# EAGLE board untitled (EAGLE 9.6.2)
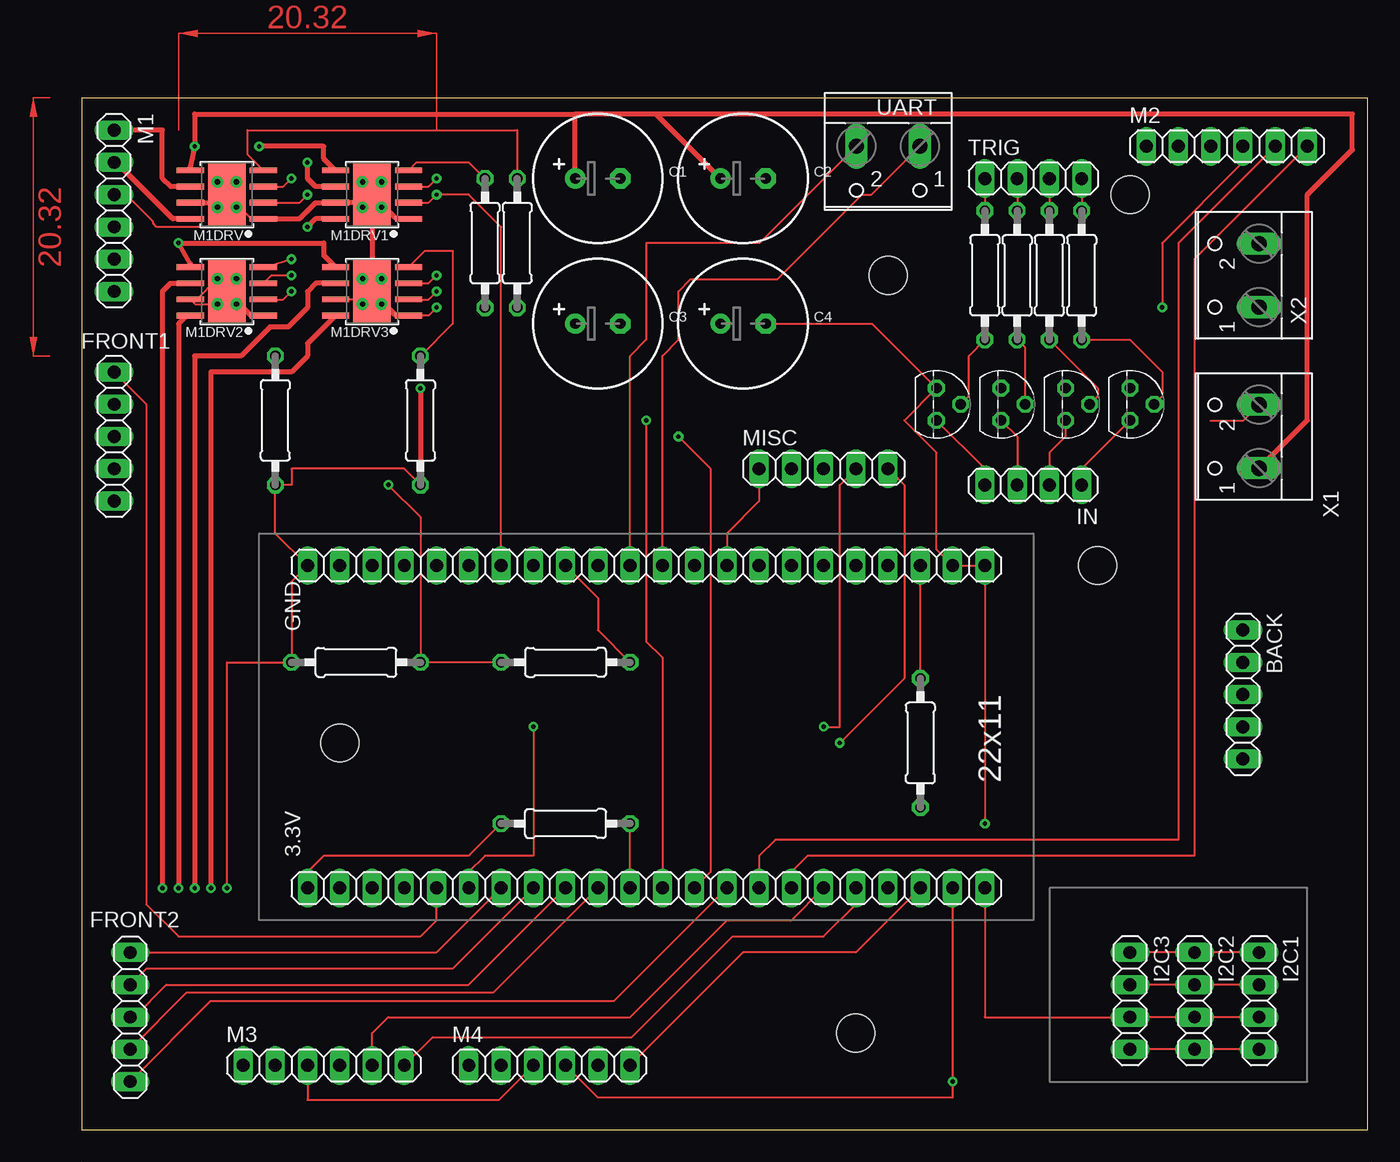
[diagram p0: board, top side]
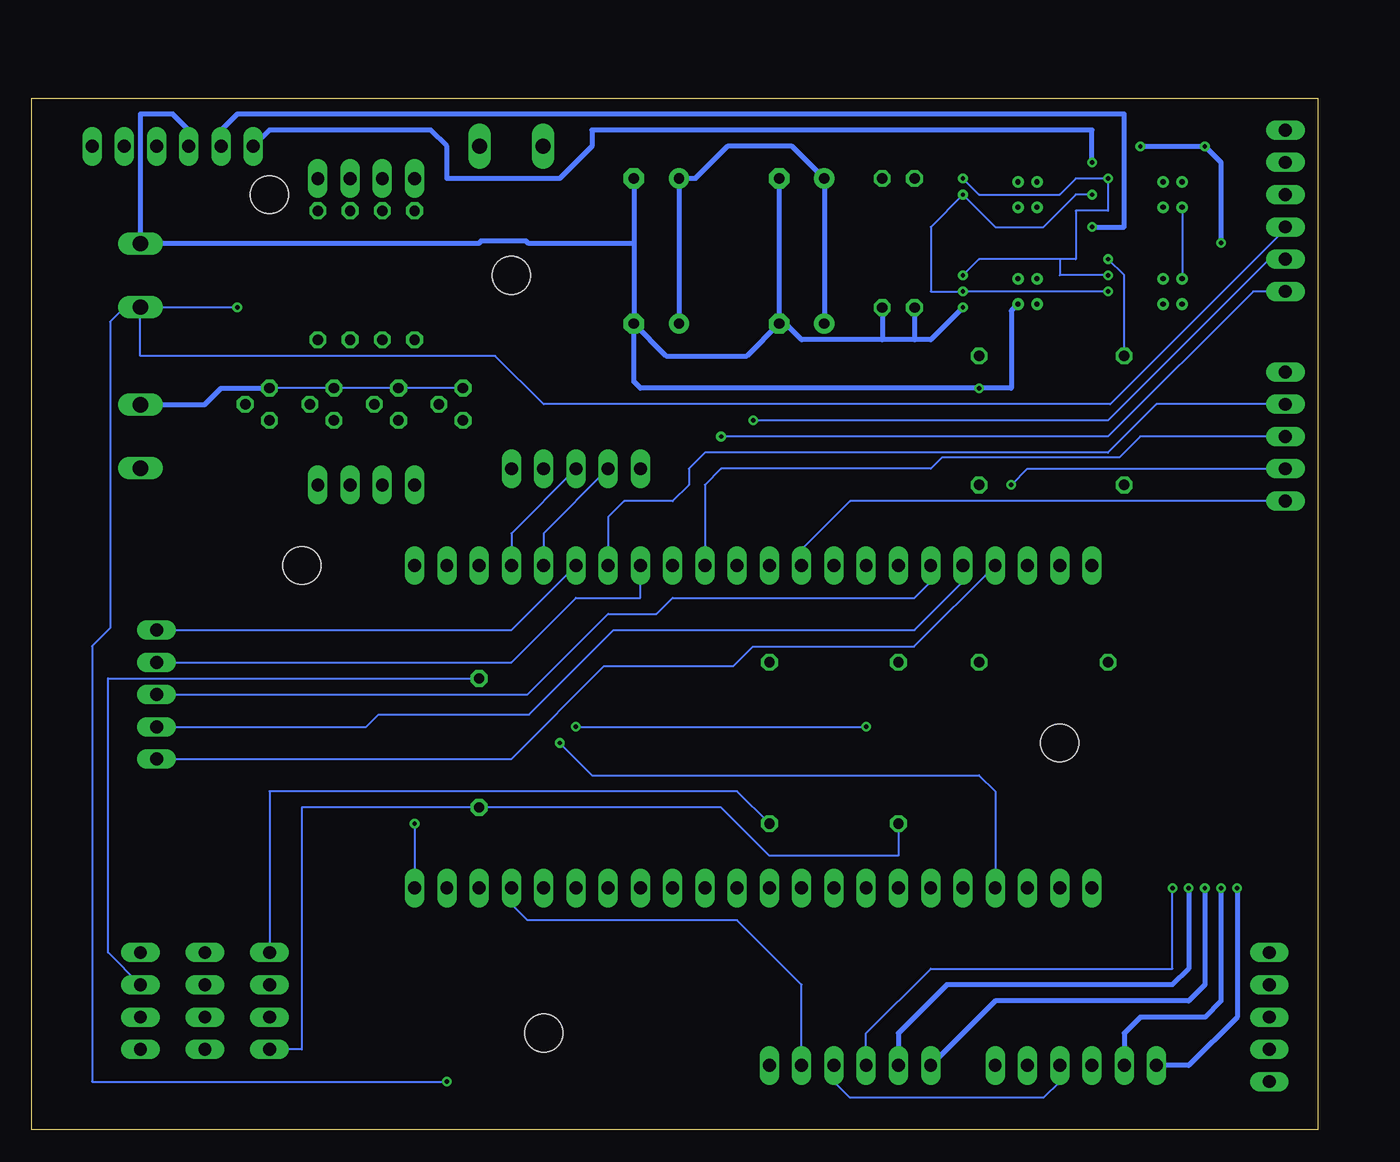
[diagram p1: board, bottom side, seen from below]

Size 101.27 x 81.27 mm. Coordinates in mm from the lower left corner, seen from the top.
Outline: 0,0 101.27,0 101.27,81.27 0,81.27 0,0
Copper layers (1*16): Top 0.035mm / dielectric 1.5mm / Bottom 0.035mm
Design rules "default": minimum track width 6mil, minimum drill 0.35mm, track to track 6mil, track to pad 6mil, pad to pad 6mil, via to via 6mil, smd to smd 6mil, copper to edge 40mil, drill to drill 6mil, minimum pad ring 10mil, minimum via ring 8mil, stop-mask expansion 4mil, vias tented up to drill 0mil, thermal gap 10mil
Net classes: 0 default: clearance 0.205 mm
Holes 3 mm at 82.55,73.66 60.96,7.62 80.01,44.45 20.32,30.48 63.5,67.31

## Footprints (pad centres in the part's own frame; a part is rotated, then mirrored left to right if it is on the bottom)
0207/10 = drill 0.813 octagon: 1 -5.08,0; 2 5.08,0
1X22 = drill 1.016 long: 1 -26.67,0; 2 -24.13,0; 3 -21.59,0; 4 -19.05,0; 5 -16.51,0; 6 -13.97,0; 7 -11.43,0; 8 -8.89,0; 9 -6.35,0; 10 -3.81,0; 11 -1.27,0; 12 1.27,0; 13 3.81,0; 14 6.35,0; 15 8.89,0; 16 11.43,0; 17 13.97,0; 18 16.51,0; 19 19.05,0; 20 21.59,0; 21 24.13,0; 22 26.67,0
1X05 = drill 1.016 long: 1 -5.08,0; 2 -2.54,0; 3 0,0; 4 2.54,0; 5 5.08,0
MICROBUILDER_CELEC_3.5MM_10MM = drill 0.813 pad 1.6: + -1.778,0 | drill 0.813 pad 1.6 octagon: - 1.778,0
1X04 = drill 1.016 long: 1 -3.81,0; 2 -1.27,0; 3 1.27,0; 4 3.81,0
1X06 = drill 1.016 long: 1 -6.35,0; 2 -3.81,0; 3 -1.27,0; 4 1.27,0; 5 3.81,0; 6 6.35,0
MICROBUILDER_HSOP8 = smd 0.45 x 2.15: 1 -1.905,-2.875; 2 -0.635,-2.875; 3 0.635,-2.875; 4 1.905,-2.875; 5 1.905,2.875; 6 0.635,2.875; 7 -0.635,2.875; 8 -1.905,2.875 | smd 4.9 x 2.95: GND 0,0 | drill 0.4: P$1 -1,0.75; P$2 -1,-0.75; P$3 1,-0.75; P$4 1,0.75
TO92 = drill 0.813 octagon: 1 1.27,0; 2 0,1.905; 3 -1.27,0
W237-102 = drill 1.194 long: 1 -2.5,-1.27; 2 2.5,-1.27

## Placement (x,y rotation side)
1K  1k  [0207/10]  38.1,24.13 0 top
1K1  1k  [0207/10]  38.1,36.83 180 top
1K2  1.8k  [0207/10]  21.59,36.83 0 top
1K3  1k  [0207/10]  76.2,67.31 90 top
1K4  1k  [0207/10]  73.66,67.31 90 top
1K5  1k  [0207/10]  71.12,67.31 90 top
1K6  1k  [0207/10]  78.74,67.31 90 top
3.3V  [1X22]  44.45,19.05 0 top
BACK  [1X05]  91.44,34.29 270 top
C1  [MICROBUILDER_CELEC_3.5MM_10MM]  40.64,74.93 0 top
C2  [MICROBUILDER_CELEC_3.5MM_10MM]  52.07,74.93 0 top
C3  [MICROBUILDER_CELEC_3.5MM_10MM]  40.64,63.5 0 top
C4  [MICROBUILDER_CELEC_3.5MM_10MM]  52.07,63.5 0 top
FRONT1  [1X05]  2.54,54.61 270 top
FRONT2  [1X05]  3.81,8.89 90 top
GND  [1X22]  44.45,44.45 0 top
I2C1  [1X04]  92.71,10.16 270 top
I2C2  [1X04]  87.63,10.16 270 top
I2C3  [1X04]  82.55,10.16 270 top
IN  [1X04]  74.93,50.8 180 top
M1  [1X06]  2.54,72.39 270 top
M1DRV  [MICROBUILDER_HSOP8]  11.43,73.66 90 top
M1DRV1  [MICROBUILDER_HSOP8]  22.86,73.66 90 top
M1DRV2  [MICROBUILDER_HSOP8]  11.43,66.04 90 top
M1DRV3  [MICROBUILDER_HSOP8]  22.86,66.04 90 top
M2  [1X06]  90.17,77.47 0 top
M3  [1X06]  19.05,5.08 0 top
M4  [1X06]  36.83,5.08 0 top
MISC  [1X05]  58.42,52.07 0 top
R1  30k  [0207/10]  31.75,69.85 270 top
R2  30k  [0207/10]  34.29,69.85 270 top
R3  1k  [0207/10]  66.04,30.48 90 top
R4  30k  [0207/10]  15.24,55.88 270 top
R5  30k  [0207/10]  26.67,55.88 270 top
T1  2N3904  [TO92]  77.47,57.15 270 top
T2  2N3904  [TO92]  72.39,57.15 270 top
T3  2N3904  [TO92]  67.31,57.15 270 top
T4  2N3904  [TO92]  82.55,57.15 270 top
TRIG  [1X04]  74.93,74.93 0 top
UART  [W237-102]  63.5,76.2 180 top
X1  [W237-102]  91.44,54.61 90 top
X2  [W237-102]  91.44,67.31 90 top

## Library data of the parts
1K 1K1-1K6 R1-R5 = rcl; SPICEPREFIX: R
3.3V BACK FRONT1 FRONT2 GND I2C1-I2C3 IN M1-M4 MISC TRIG = pinhead
C1-C4 M1DRV M1DRV1-M1DRV3 = Adafruit DRV8871
T1-T4 = transistor
UART X1 X2 = con-wago-500; MPN: 237-102; OC_FARNELL: unknown; OC_NEWARK: 70K9898

## Nets
+3V3: 1K.1 3.3V.1 I2C1.4 I2C2.4 I2C3.4 R3.1
+5V: 3.3V.21 M1.4 M2.4 M3.4 M4.4 X2.1
+12V: C1.+ C2.+ C3.+ C4.+ M1DRV1.5 M1DRV2.5 M1DRV3.5 M1DRV.5 X1.1
ARM2: BACK.1 GND.17
GND: 1K2.1 3.3V.22 C1.- C2.- C3.- C4.- GND.1 GND.21 GND.22 I2C1.3 I2C2.3 I2C3.3 M1.3 M1DRV1.1 M1DRV1.7 M1DRV1.GND M1DRV1.P$1 M1DRV1.P$2 M1DRV1.P$3 M1DRV1.P$4 M1DRV2.1 M1DRV2.7 M1DRV2.GND M1DRV2.P$1 M1DRV2.P$2 M1DRV2.P$3 M1DRV2.P$4 M1DRV3.1 M1DRV3.7 M1DRV3.GND M1DRV3.P$1 M1DRV3.P$2 M1DRV3.P$3 M1DRV3.P$4 M1DRV.1 M1DRV.7 M1DRV.GND M1DRV.P$1 M1DRV.P$2 M1DRV.P$3 M1DRV.P$4 M2.3 M3.3 M4.3 R1.2 R2.2 R4.2 R5.2 T1.3 T2.3 T3.3 T4.3 X1.2 X2.2
IN: IN.1 T4.1
M1+: M1.1 M1DRV.6
M1-: M1.2 M1DRV.8
M2+: M1DRV1.6 M2.1
M2-: M1DRV1.8 M2.2
M3+: M1DRV2.6 M3.1
M3-: M1DRV2.8 M3.2
M4+: M1DRV3.6 M4.1
M4-: M1DRV3.8 M4.2
N$1: M1DRV1.4 R1.1
N$2: M1DRV2.4 R4.1
N$3: 1K1.1 GND.9
N$4: M1DRV3.4 R5.1
N$5: GND.11 UART.2
N$6: GND.12 UART.1
N$7: IN.2 T1.1
N$8: 1K3.1 T1.2
N$9: M1DRV.4 R2.1
N$10: 1K3.2 TRIG.3
N$11: IN.3 T2.1
N$12: 1K4.1 T2.2
N$13: 1K4.2 TRIG.2
N$14: IN.4 T3.1
N$15: 1K5.1 T3.2
N$16: 1K5.2 TRIG.1
N$18: 1K6.1 T4.2
N$19: 1K6.2 TRIG.4
P0: GND.14 MISC.1
P1ARM3: BACK.5 GND.4
P2ARM4: BACK.4 GND.5
P3: 3.3V.13 M1.6
P4: 3.3V.4 MISC.5
P5BUZZER: 3.3V.5 FRONT1.1
P6: 3.3V.6 MISC.4
P7STEER: 3.3V.7 FRONT2.5
P8: 3.3V.12 M1.5
P9: 3.3V.15 M2.5
P10: 3.3V.16 M2.6
P11: 3.3V.17 M3.5
P12: 3.3V.18 M3.6
P13: 3.3V.19 M4.5
P14: 3.3V.20 M4.6
P15LASERX: 3.3V.8 FRONT2.4
P16LASERY: 3.3V.9 FRONT2.3
P17LASERTRIG: 3.3V.10 FRONT2.2
P18SDA: 1K.2 3.3V.11 I2C1.1 I2C2.1 I2C3.1
P19SCL: GND.20 I2C1.2 I2C2.2 I2C3.2 R3.2
P20: GND.19 MISC.3
P21: GND.18 MISC.2
P35SONAR: FRONT1.3 GND.13
P38SONARTRIG: FRONT1.5 GND.10
P39SONARECHO: 1K1.2 1K2.2 FRONT1.4
P40: M1DRV1.3 M1DRV2.3 M1DRV3.3 M1DRV.3
P40PWM2: GND.8
P41PWM1: GND.7 M1DRV1.2 M1DRV2.2 M1DRV3.2 M1DRV.2
P42ARM1: BACK.3 GND.6
P43: GND.2
P44: GND.3
P45REARBUMP: BACK.2 GND.15
P46FRONTBUMP: 3.3V.14 FRONT2.1
P48LED: FRONT1.2 GND.16

## Tracks (layer width: path | path; a pad name or v marks a point on that pad's centre or on a via)
+3V3
  Top 0.152: I2C1.4 I2C2.4 I2C3.4 | 1K.1 30.48,21.59 19.05,21.59 17.78,20.32 3.3V.1
  Bottom 0.152: 1K.1 33.02,21.59 43.18,21.59 46.99,25.4 R3.1 80.01,25.4 80.01,6.35 I2C3.4
+5V  (via drill 0.35)
  Top 0.152: 3.3V.21 v68.58,3.81 68.58,2.54 40.64,2.54 M4.4 | M2.4 91.44,76.2 85.09,69.85 v85.09,64.77
  Bottom 0.152: M3.4 20.32,3.81 21.59,2.54 36.83,2.54 38.1,3.81 M4.4 | M1.4 2.54,70.94 16.34,57.15 60.96,57.15 64.77,60.96 92.71,60.96 X2.1 85.13,64.81 v85.09,64.77 93.98,64.77 95.1,63.65 95.1,39.52 96.52,38.1 96.52,3.81 v68.58,3.81
+12V  (via drill 0.35)
  Top 0.406: C1.+ 38.86,80.01 | C2.+ 45.21,80.01 | 45.21,80.01 38.86,80.01 | 45.21,80.01 100.05,80.01 100.05,77.19 96.52,73.66 96.52,55.88 96.48,55.88 X1.1 | M1DRV.5 8.55,75.86 v8.89,77.47 8.89,80.01 38.86,80.01 | M1DRV2.5 8.55,68.24 v7.62,69.85 19.05,69.85 19.05,68.88 M1DRV3.5 | M1DRV1.5 19.05,76.5 19.05,77.47 v13.97,77.47
  Bottom 0.406: v7.62,69.85 7.62,76.2 v8.89,77.47 v13.97,77.47 | C4.+ C2.+ 49.02,74.93 46.48,77.47 41.4,77.47 C1.+ C3.+
ARM2
  Bottom 0.152: BACK.1 63.5,39.37 GND.17
GND  (via drill 0.35)
  Top 0.152: I2C1.3 I2C2.3 I2C3.3 71.12,8.89 3.3V.22 | M3.3 17.78,2.36 32.84,2.36 M4.3 | 10.43,65.04 8.92,65.04 M1DRV2.7 9.04,65.41 M1DRV2.P$4 11.43,66.29 | 10.43,65.04 M1DRV2.P$1 11.43,65.79 M1DRV2.GND | M1DRV.1 13.33,71.75 M1DRV.GND | M1DRV3.P$2 24.52,64.14 M1DRV3.1 27.3,64.14 v27.94,64.77 | 22.86,66.29 M1DRV3.P$4 | M1DRV3.GND 22.22,65.41 M1DRV3.7 | R5.2 25.4,52.07 16.51,52.07 16.51,50.8 R4.2 15.24,46.99 GND.1 16.51,43.18 1K2.1 11.43,36.83 v11.43,19.05 | X1.2 91.44,55.84 88.9,55.84 | C4.- 62.23,63.5 T3.3 64.77,55.88 67.31,53.34 67.31,45.72 GND.21 GND.22 v71.12,24.13 | 11.43,73.91 M1DRV.P$3 | M1DRV.GND 12.18,72.91 M1DRV.P$2 | M1DRV.GND 11.43,73.41 M1DRV.P$1 10.68,71.12 5.92,71.12 5.62,71.42 5.62,71.55 3.51,73.66 M1.3 | M1DRV1.GND 23.61,72.91 M1DRV1.P$2 | M1DRV1.GND 22.86,73.41 M1DRV1.P$1 | M1DRV3.GND 22.86,66.29 | 22.86,66.29 M1DRV3.P$3 | M1DRV3.GND 24.13,64.77 | M1DRV3.GND 22.86,65.79 M1DRV3.P$1 | 11.43,66.29 M1DRV2.P$3 | M1DRV2.GND 10.43,65.04 | M1DRV2.GND 11.43,66.29 | M1DRV2.GND 12.7,64.77 | M1DRV2.GND 12.18,65.29 M1DRV2.P$2 | M1DRV1.GND 22.11,74.41 M1DRV1.P$4 | M1DRV.GND 11.43,73.91 | 11.43,73.91 M1DRV.P$4 | M1DRV1.GND 22.86,73.91 M1DRV1.P$3
  Top 0.406: 24.13,64.77 24.77,64.14 M1DRV3.1 | 12.7,64.77 13.33,64.14 M1DRV2.1 | M1DRV.1 17.14,71.75 18.41,73.02 M1DRV1.7 22.22,73.02 M1DRV1.GND 22.86,67.79 M1DRV3.P$4 | M1DRV1.1 24.77,71.75 23.86,72.66 M1DRV1.P$2 | M1DRV.7 10.79,73.02 M1DRV.GND | v26.67,58.42 R5.2
  Bottom 0.152: M1DRV.P$1 M1DRV2.P$4 | T3.3 T2.3 T1.3 T4.3 | M4.3 35.56,7.62 30.48,12.7 11.43,12.7 v11.43,19.05 | v71.12,24.13 3.3V.22
  Bottom 0.406: M2.3 88.9,78.74 90.17,80.01 92.71,80.01 92.71,69.85 | 92.71,69.85 X2.2 | C1.- C3.- | C2.- 53.85,69.85 | 53.85,69.85 C4.- | C4.- 51.31,60.96 44.96,60.96 C3.- | 31.75,62.23 30.48,62.23 v27.94,64.77 | 31.75,62.23 34.29,62.23 | 34.29,62.23 40.64,62.23 41.91,63.5 C3.- | R1.2 31.75,62.23 | R2.2 34.29,62.23 | 53.85,69.85 62.19,69.85 62.37,70.03 65.86,70.03 66.08,69.81 92.67,69.81 92.71,69.85 | X1.2 87.67,57.11 86.36,58.42 T4.3 | M1DRV3.P$2 24.13,64.52 24.13,58.42 v26.67,58.42 53.34,58.42 53.85,58.93 C4.-
IN
  Top 0.152: IN.1 78.74,52.07 T4.1
M1+
  Top 0.406: M1DRV.6 6.98,74.3 6.35,74.93 6.35,78.74 M1.1
M1-
  Top 0.406: M1DRV.8 7.16,71.75 2.72,76.2 M1.2
M2+  (via drill 0.35)
  Top 0.406: M1DRV1.6 18.41,74.3 17.78,74.93 v17.78,76.2
  Bottom 0.406: v17.78,76.2 17.78,78.74 57.15,78.74 57.15,77.47 59.69,74.93 68.58,74.93 68.58,77.47 69.85,78.74 82.55,78.74 M2.1
M2-  (via drill 0.35)
  Top 0.406: M1DRV1.8 18.41,71.75 v17.78,71.12
  Bottom 0.406: v17.78,71.12 15.24,71.12 15.24,80.01 85.09,80.01 86.36,78.74 M2.2
M3+  (via drill 0.35)
  Top 0.406: M1DRV2.6 6.98,66.67 6.35,66.04 v6.35,19.05
  Bottom 0.406: v6.35,19.05 6.35,8.89 10.16,5.08 M3.1
M3-  (via drill 0.35)
  Top 0.406: M1DRV2.8 8.26,64.14 7.62,63.5 v7.62,19.05
  Bottom 0.406: v7.62,19.05 7.62,10.16 8.89,8.89 13.97,8.89 15.24,7.62 M3.2
M4+  (via drill 0.35)
  Top 0.406: M1DRV3.6 18.41,66.67 17.78,66.04 17.78,64.77 16.26,63.25 14.82,63.25 12.53,60.96 8.89,60.96 v8.89,19.05
  Bottom 0.406: v8.89,19.05 8.89,11.43 10.16,10.16 25.4,10.16 M4.1
M4-  (via drill 0.35)
  Top 0.406: M1DRV3.8 17.78,61.93 17.78,60.96 16.51,59.69 10.16,59.69 v10.16,19.05
  Bottom 0.406: v10.16,19.05 10.16,12.7 11.43,11.43 29.21,11.43 33.02,7.62 M4.2
N$1
  Top 0.152: M1DRV1.4 26.37,76.2 30.48,76.2 R1.1
N$2  (via drill 0.35)
  Top 0.152: v16.51,68.58 14.61,67.94 M1DRV2.4
  Bottom 0.152: v16.51,68.58 15.24,67.31 R4.1
N$3
  Top 0.152: GND.9 40.64,41.91 40.64,39.37 1K1.1
N$4
  Top 0.152: R5.1 29.21,63.5 29.21,69.21 27,69.21 M1DRV3.4
N$5
  Top 0.152: UART.2 53.38,69.85 44.45,69.85 44.45,62.23 43.18,60.96 GND.11
N$6
  Top 0.152: GND.12 45.72,60.96 46.99,62.23 46.99,66.04 47.96,67 54.78,67 61.43,73.66 62.19,73.66 UART.1
N$7
  Top 0.152: T1.1 77.47,54.61 76.2,53.34 IN.2
N$8
  Top 0.152: 1K3.1 80.01,58.42 80.01,57.79 T1.2
N$9
  Top 0.152: M1DRV.4 13.04,76.83 13.04,78.74 34.29,78.74 R2.1
N$10
  Top 0.152: TRIG.3 1K3.2
N$11
  Top 0.152: T2.1 73.66,54.61 IN.3
N$12
  Top 0.152: T2.2 74.3,61.6 1K4.1
N$13
  Top 0.152: TRIG.2 1K4.2
N$14
  Top 0.152: T3.1 71.12,52.07 IN.4
N$15
  Top 0.152: T3.2 69.85,57.79 69.85,60.96 1K5.1
N$16
  Top 0.152: TRIG.1 1K5.2
N$18
  Top 0.152: 1K6.1 82.55,62.23 85.09,59.69 85.09,57.79 T4.2
N$19
  Top 0.152: TRIG.4 1K6.2
P0
  Top 0.152: MISC.1 53.34,49.53 50.8,46.99 GND.14
P1ARM3
  Bottom 0.152: BACK.5 63.5,29.21 56.19,36.53 46.03,36.53 44.49,38.07 31.79,38.07 GND.4
P2ARM4
  Bottom 0.152: BACK.4 74.93,31.75 73.96,32.72 62.1,32.72 55.45,39.37 31.75,39.37 27.94,43.18 GND.5
P3  (via drill 0.35)
  Top 0.152: v46.99,54.61 49.53,52.07 49.53,20.32 3.3V.13
  Bottom 0.152: M1.6 5.08,66.04 16.51,54.61 v46.99,54.61
P4  (via drill 0.35)
  Top 0.152: MISC.5 64.77,50.8 64.77,35.56 v59.69,30.48
  Bottom 0.152: v59.69,30.48 57.15,27.94 26.67,27.94 25.4,26.67 3.3V.4
P5BUZZER
  Top 0.152: 3.3V.5 27.94,16.51 26.67,15.24 7.62,15.24 5.08,17.78 5.08,57.15 FRONT1.1
P6  (via drill 0.35)
  Top 0.152: v58.42,31.75 59.69,31.75 59.69,50.8 MISC.4 | v35.56,31.75 35.56,21.59 31.75,21.59 30.48,20.32 3.3V.6
  Bottom 0.152: v58.42,31.75 v35.56,31.75
P7STEER
  Top 0.152: FRONT2.5 27.94,13.97 3.3V.7
P8  (via drill 0.35)
  Top 0.152: 3.3V.12 45.72,37.21 44.45,38.48 v44.45,55.88
  Bottom 0.152: M1.5 3.81,68.58 16.51,55.88 v44.45,55.88
P9
  Top 0.152: M2.5 86.36,69.85 86.36,22.86 54.61,22.86 53.34,21.59 3.3V.15
P10
  Top 0.152: 3.3V.16 55.88,20.32 57.15,21.59 87.63,21.59 87.63,68.58 M2.6
P11
  Top 0.152: M3.5 22.86,7.62 24.13,8.89 43.18,8.89 50.8,16.51 55.88,16.51 3.3V.17
P12
  Top 0.152: M3.6 27.63,7.31 43.31,7.31 51.23,15.24 58.42,15.24 60.96,17.78 3.3V.18
P13
  Bottom 0.152: M4.5 40.64,11.43 45.72,16.51 62.23,16.51 63.5,17.78 3.3V.19
P14
  Top 0.152: 3.3V.20 60.96,13.97 52.07,13.97 M4.6
P15LASERX
  Top 0.152: FRONT2.4 5.08,12.7 29.21,12.7 3.3V.8
P16LASERY
  Top 0.152: FRONT2.3 4.12,8.89 6.65,11.43 30.48,11.43 3.3V.9
P17LASERTRIG
  Top 0.152: FRONT2.2 8.28,10.82 32.41,10.82 3.3V.10
P18SDA
  Top 0.152: 3.3V.11 1K.2 | I2C3.1 I2C2.1 I2C1.1
  Bottom 0.152: 1K.2 45.72,26.67 82.55,26.67 I2C3.1
P19SCL
  Top 0.152: R3.2 GND.20 | I2C1.2 I2C2.2 I2C3.2
  Bottom 0.152: I2C1.2 95.25,13.97 95.25,35.56 R3.2
P20
  Bottom 0.152: MISC.3 63.5,46.99 GND.19
P21
  Bottom 0.152: MISC.2 60.96,46.99 GND.18
P35SONAR
  Bottom 0.152: FRONT1.3 13.97,54.61 15.62,52.96 29.58,52.96 30.47,52.07 46.99,52.07 48.26,50.8 GND.13
P38SONARTRIG
  Bottom 0.152: FRONT1.5 36.83,49.53 40.64,45.72 GND.10
P39SONARECHO  (via drill 0.35)
  Top 0.152: 1K1.2 1K2.2 26.67,48.26 v24.13,50.8
  Bottom 0.152: FRONT1.4 22.86,52.07 v24.13,50.8
P40  (via drill 0.35)
  Top 0.152: M1DRV.3 15.88,74.3 v16.51,74.93 | M1DRV1.3 27.3,74.3 v27.94,74.93 | M1DRV3.3 27.3,66.67 v27.94,67.31 | M1DRV2.3 14.94,67.31 v16.51,67.31
  Bottom 0.152: v27.94,74.93 26.67,73.66 20.32,73.66 19.05,74.93 v16.51,74.93 16.51,72.39 19.05,72.39 19.05,68.58 20.32,68.58 | v27.94,67.31 26.67,68.58 20.32,68.58 | v16.51,67.31 20.32,67.31 20.32,68.58
P41PWM1  (via drill 0.35)
  Top 0.152: M1DRV.2 17.14,73.02 v17.78,73.66 | M1DRV1.2 27.3,73.02 v27.94,73.66 30.48,73.66 33.02,71.12 GND.7 | M1DRV3.2 27.3,65.41 v27.94,66.04 | M1DRV2.2 15.88,65.41 v16.51,66.04
  Bottom 0.152: v17.78,73.66 19.05,73.66 21.59,71.12 25.4,71.12 v27.94,73.66 30.48,71.12 30.48,66.04 v27.94,66.04 v16.51,66.04
P42ARM1
  Bottom 0.152: BACK.3 62.23,34.29 55.88,40.64 52.07,40.64 50.8,41.91 31.75,41.91 30.48,43.18 GND.6
P45REARBUMP
  Bottom 0.152: BACK.2 63.5,36.83 58.42,41.91 53.34,41.91 GND.15
P46FRONTBUMP
  Top 0.152: FRONT2.1 10.16,10.16 41.91,10.16 3.3V.14
P48LED
  Bottom 0.152: FRONT1.2 12.7,57.15 16.51,53.34 48.26,53.34 49.53,52.07 49.53,50.8 50.8,49.53 54.61,49.53 55.88,48.26 GND.16
(copper drawn outside any net)
  shapes: Top area x2

## Text on the board
tDocu: 1 | 1 | g | p5 | p48 | g | p35 | p39 | +12 | p38 | p47 | p45 | p42 | p2 | p1 | p7 | sda | p15 | scl | p16 | gnd | p17 | vcc | p46 | 1 | 1
_tsilk: 22x11